# EAGLE board Simple-Charger-LiIon-OpampBased-LM324-prev (EAGLE 7.7.0)
Simple LM358 OP-AMP based USB Li-ion charger https://www.circuitsdiy.com/simple-lm358-op-amp-based-usb-li-ion-charger/ https://www.circuitsdiy.com/usb-li-ion-charger-revision/
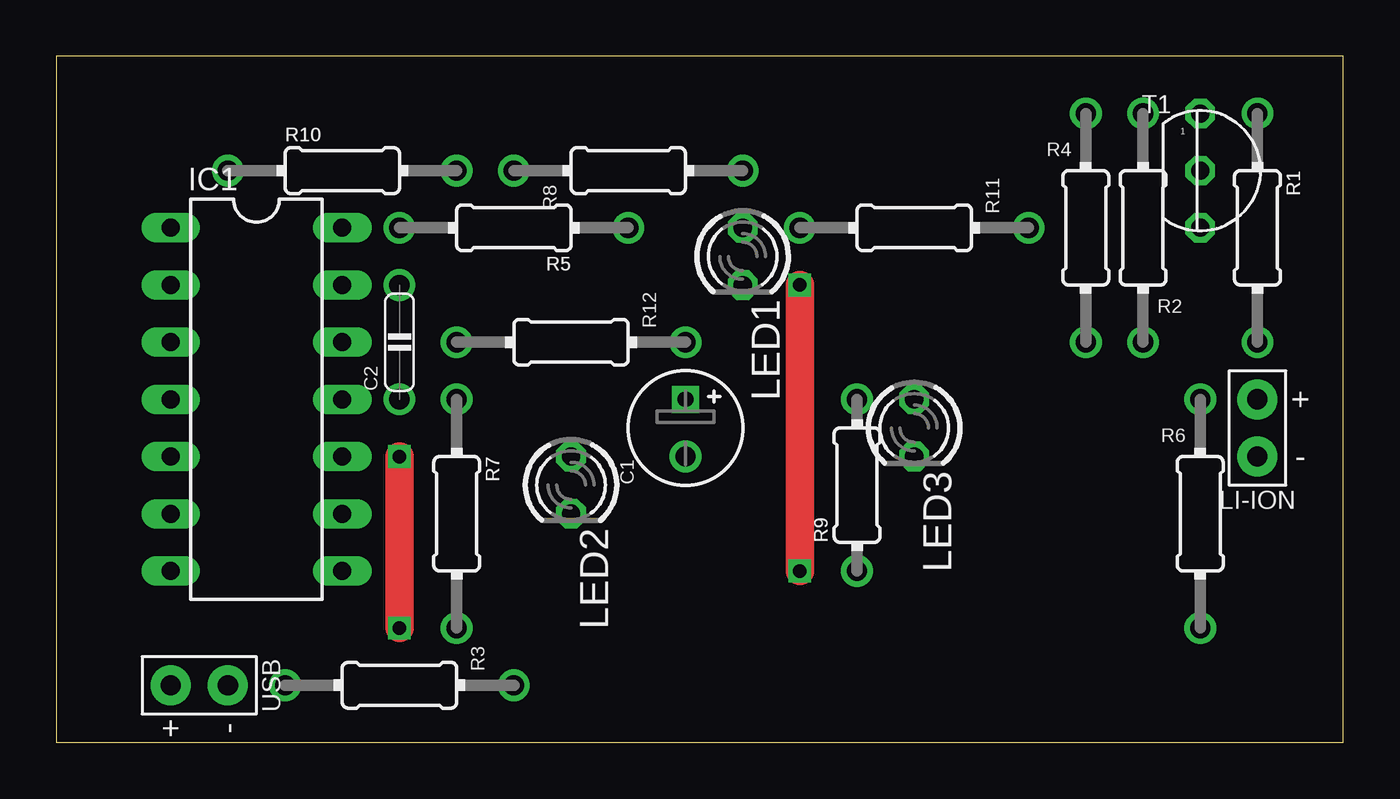
[diagram p0: board, top side]
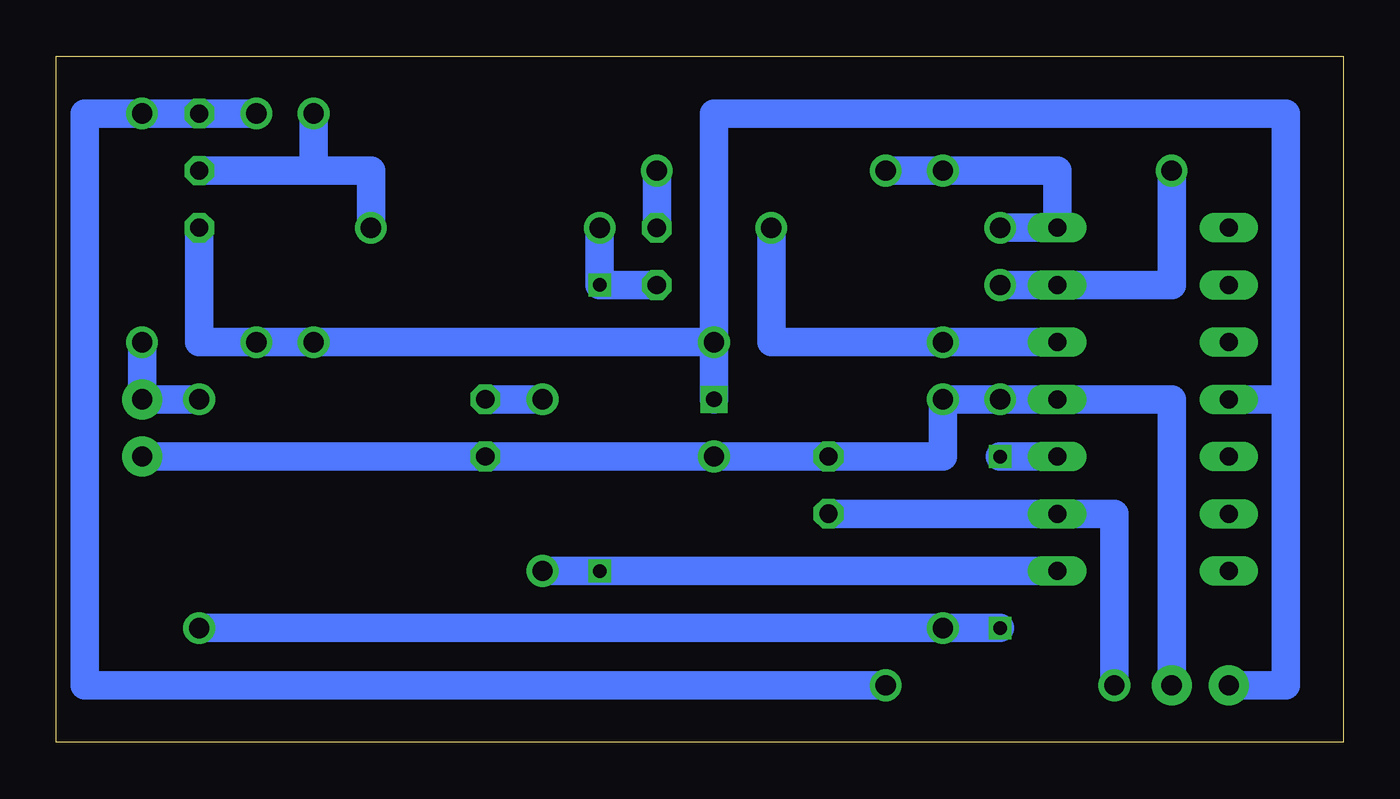
[diagram p1: board, bottom side, seen from below]

Size 57.15 x 30.48 mm. Coordinates in mm from the lower left corner, seen from the top.
Outline: 0,0 57.15,0 57.15,30.48 0,30.48 0,0
Copper layers (1*16): Top 0.035mm / dielectric 1.5mm / Bottom 0.035mm
Design rules "default": minimum track width 10mil, minimum drill 24mil, track to track 8mil, track to pad 8mil, pad to pad 8mil, via to via 8mil, smd to smd 8mil, copper to edge 40mil, drill to drill 8mil, minimum pad ring 10mil, minimum via ring 8mil, stop-mask expansion 4mil, vias tented up to drill 0mil, thermal gap 10mil

## Footprints (pad centres in the part's own frame; a part is rotated, then mirrored left to right if it is on the bottom)
E2,5-5 = drill 0.7 square: + 1.27,0 | drill 0.9: - -1.27,0
C050-020X044 = drill 0.9: 1 -2.54,0; 2 2.54,0
DIL14 = drill 0.8 long: 1 -3.81,7.62; 2 -3.81,5.08; 3 -3.81,2.54; 4 -3.81,0; 5 -3.81,-2.54; 6 -3.81,-5.08; 7 -3.81,-7.62; 8 3.81,-7.62; 9 3.81,-5.08; 10 3.81,-2.54; 11 3.81,0; 12 3.81,2.54; 13 3.81,5.08; 14 3.81,7.62
LED3MM = drill 0.813 octagon: A -1.27,0; K 1.27,0
SPAD+- = drill 0.9 pad 1.778: 1 0,-1.27; 2 0,1.27
0204/10 = drill 0.9: 1 -5.08,0; 2 5.08,0
0204/10-V = drill 0.9: 1 0,5.08; 2 0,-5.08
0204/7-V = drill 0.9: 1 0,3.81; 2 0,-3.81
TO92 = drill 0.8 octagon: 1 0,2.54; 2 0,0; 3 0,-2.54
SPAD-+ = drill 0.9 pad 1.778: 1 0,-1.27; 2 0,1.27

## Placement (x,y rotation side)
C1  100μF/16V  [E2,5-5]  27.94,13.97 90 top
C2  68nF  [C050-020X044]  15.24,17.78 90 top
IC1  LM324N  [DIL14]  8.89,15.24 0 top
LED1  Red  [LED3MM]  30.48,21.59 270 top
LED2  Green  [LED3MM]  22.86,11.43 270 top
LED3  Blue  [LED3MM]  38.1,13.97 270 top
LI-ION  SPAD+-+-  [SPAD+-]  53.34,13.97 0 top
R1  1Ω  [0204/10]  53.34,22.86 270 top
R2  2.7kΩ  [0204/10-V]  48.26,22.86 180 top
R3  2.2kΩ  [0204/10-V]  15.24,2.54 270 top
R4  220Ω  [0204/10-V]  45.72,22.86 0 top
R5  470Ω  [0204/10]  20.32,22.86 180 top
R6  4.7kΩ  [0204/10-V]  50.8,10.16 0 top
R7  3.6kΩ  [0204/10]  17.78,10.16 270 top
R8  680Ω  [0204/10-V]  25.4,25.4 90 top
R9  1kΩ  [0204/7-V]  35.56,11.43 0 top
R10  680kΩ  [0204/10]  12.7,25.4 0 top
R11  470Ω  [0204/10-V]  38.1,22.86 270 top
R12  12kΩ  [0204/10-V]  22.86,17.78 270 top
T1  BC327  [TO92]  50.8,25.4 0 top
USB  SPAD+--+  [SPAD-+]  6.35,2.54 90 top

## Library data of the parts
C1 C2 = c
IC1 = ic
LED1-LED3 = led
LI-ION USB = pad
R1-R12 = r
T1 = t

## Nets
GND: C1.- C2.1 IC1.11 LED2.A LED3.K LI-ION.1 R7.1 USB.1
N$1: IC1.12 R5.1 R12.2
N$2: IC1.14 R5.2 R8.1 R10.2
N$3: C2.2 IC1.13 R10.1
N$5: IC1.9 LED2.K R3.2
N$6: LED3.A R9.1
N$7: IC1.8 LED1.K R9.2 R11.2
N$8: LED1.A R8.2
N$9: R4.1 R11.1 T1.2
N$11: R1.1 R2.2 R3.1 T1.1
N$12: LI-ION.2 R1.2 R6.1
N$13: IC1.10 R6.2 R7.2
V+: C1.+ IC1.4 R2.1 R4.2 R12.1 T1.3 USB.2

## Tracks (layer width: path | path; a pad name or v marks a point on that pad's centre or on a via)
GND
  Bottom 1.27: USB.1 7.62,15.24 IC1.11 C2.1 R7.1 17.78,12.7 LED2.A C1.- | C1.- 29.21,12.7 | C1.- LED3.K LI-ION.1
N$1
  Bottom 1.27: IC1.12 R12.2 25.4,17.78 R5.1
N$2
  Bottom 1.27: R8.1 R10.2 12.7,25.4 IC1.14 R5.2
N$3
  Bottom 1.27: R10.1 7.62,20.32 IC1.13 C2.2
N$5
  Bottom 1.27: LED2.K IC1.9 | R3.2 10.16,10.16 IC1.9 | 11.43,10.16 IC1.9
N$6
  Bottom 1.27: R9.1 LED3.A
N$7  (via drill 0.6)
  Top 1.27: v33.02,7.62 v33.02,20.32
  Bottom 1.27: IC1.8 v33.02,7.62 R9.2 | LED1.K v33.02,20.32 R11.2
N$8
  Bottom 1.27: LED1.A R8.2
N$9
  Bottom 1.27: T1.2 45.72,25.4 | R11.1 43.18,24.13 43.18,25.4 45.72,25.4 | 45.72,25.4 R4.1
N$11
  Bottom 1.27: R3.1 55.88,2.54 55.88,27.94 T1.1 | T1.1 R1.1 | R2.2 T1.1
N$12
  Bottom 1.27: R6.1 LI-ION.2 R1.2
N$13  (via drill 0.6)
  Top 1.27: v15.24,12.7 v15.24,5.08
  Bottom 1.27: IC1.10 v15.24,12.7 | v15.24,5.08 R7.2 R6.2
V+
  Bottom 1.27: USB.2 2.54,2.54 2.54,15.24 | IC1.4 2.54,15.24 | 2.54,15.24 2.54,27.94 27.94,27.94 R12.1 | T1.3 50.8,17.78 R2.1 | C1.+ R12.1 | R12.1 R2.1 | R2.1 R4.2